# EAGLE board X04A-005-B (EAGLE 6.3)
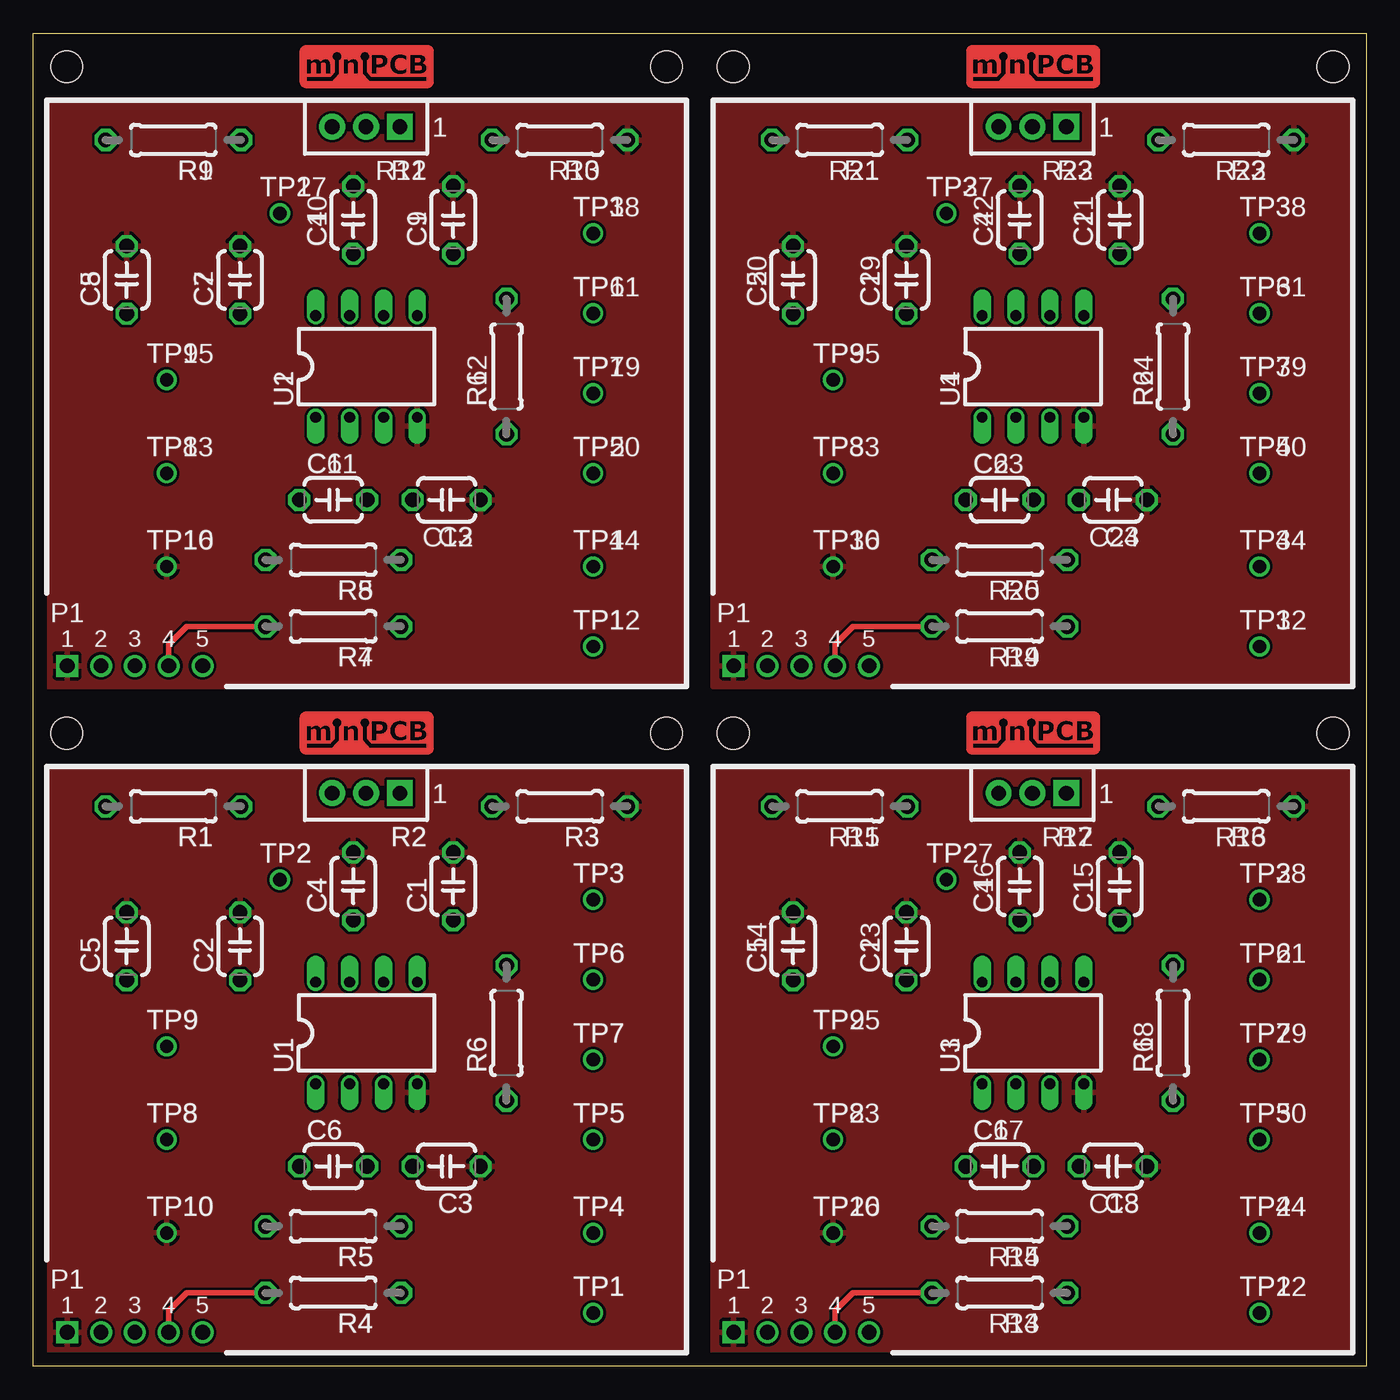
[diagram p0: board, top side]
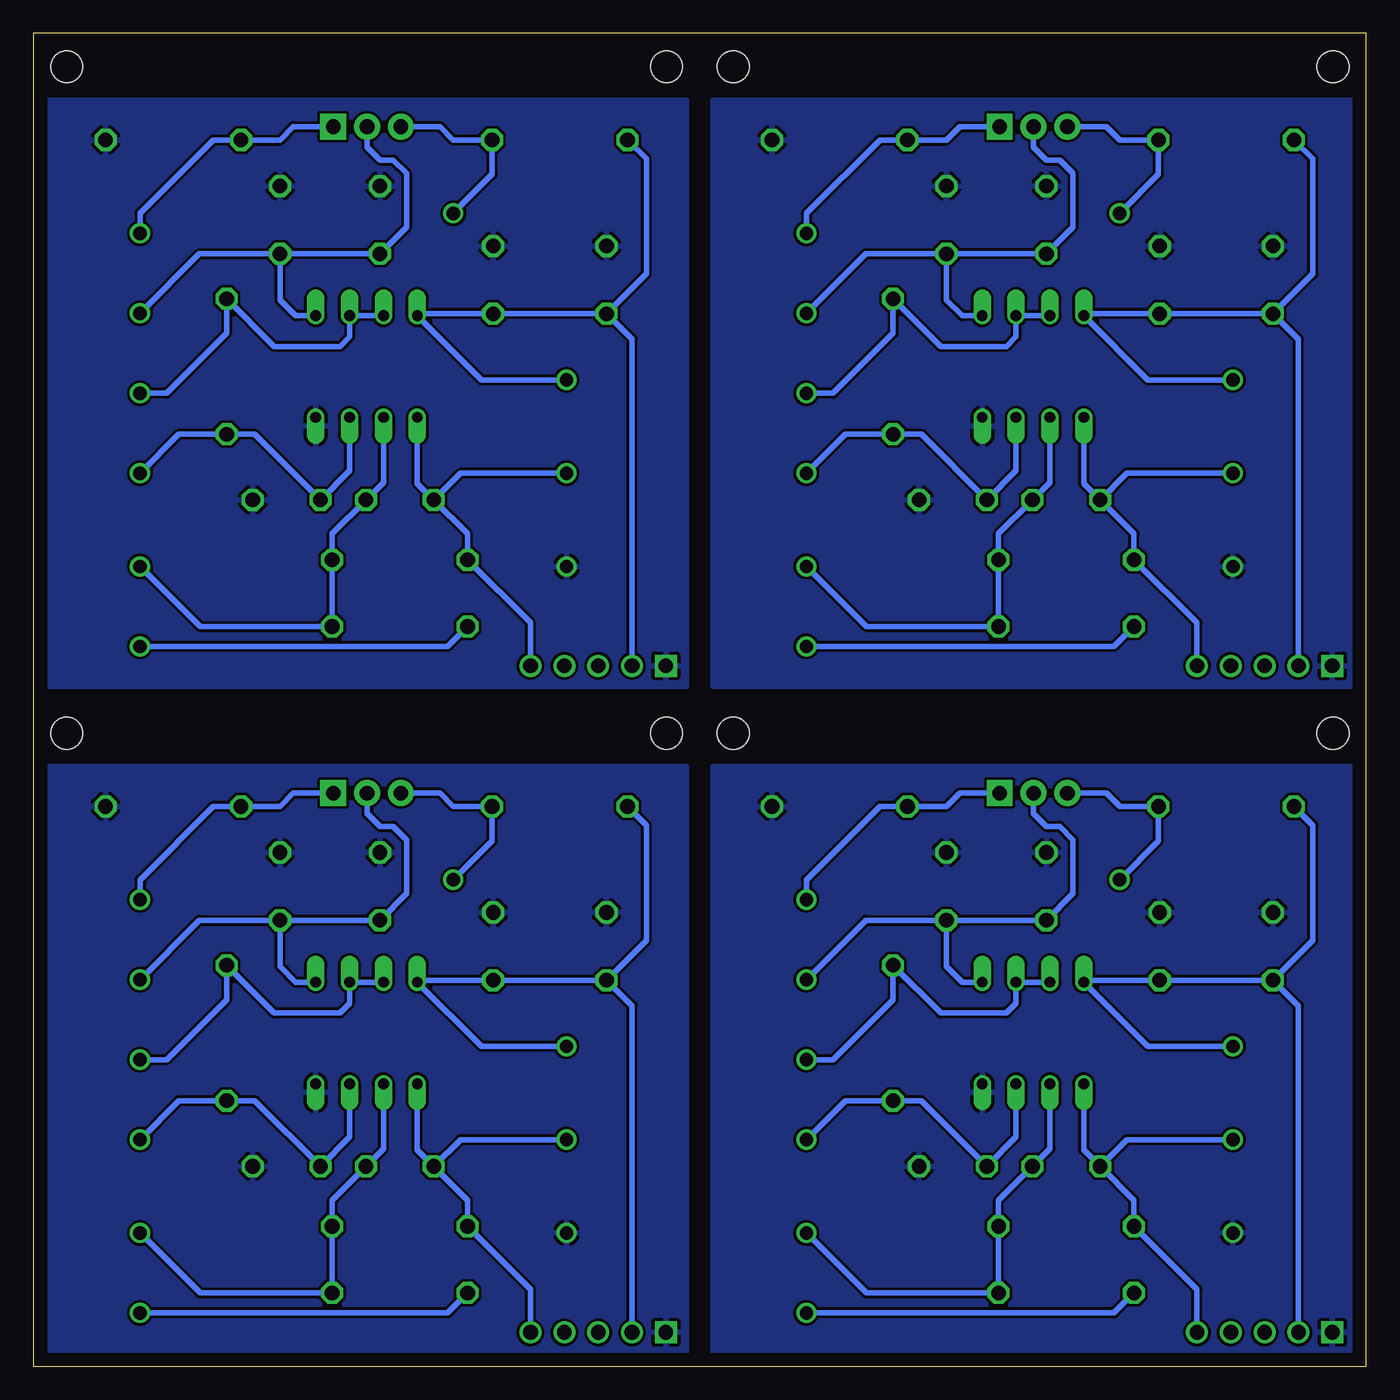
[diagram p1: board, bottom side, seen from below]

Size 100 x 100 mm. Coordinates in mm from the lower left corner, seen from the top.
Outline: 0,0 0,100 100,100 100,0 0,0
Copper layers (1*16): Top 0.035mm / dielectric 1.5mm / Bottom 0.035mm
Design rules "minipcb": minimum track width 10mil, minimum drill 24mil, track to track 8mil, track to pad 8mil, pad to pad 8mil, via to via 8mil, smd to smd 8mil, copper to edge 40mil, drill to drill 8mil, minimum pad ring 10mil, minimum via ring 8mil, stop-mask expansion 4mil, vias tented up to drill 20mil, thermal gap 10mil

## Footprints (pad centres in the part's own frame; a part is rotated, then mirrored left to right if it is on the bottom)
C050-024X044 = drill 1.1 octagon: 1 -2.54,0; 2 2.54,0
MINIPCB_5P_50X50MM = drill 1.1 square: 1 2.54,2.54 | drill 1.1: 2 5.08,2.54; 3 7.62,2.54; 4 10.16,2.54; 5 12.7,2.54 | hole 2.4: 47.5,47.5; 2.5,47.5
0207/10 = drill 1.1 octagon: 1 -5.08,0; 2 5.08,0
TRIM_0100 = drill 1.1 pad 1.93 square: 1 0,0 | drill 1.1 pad 1.93: 2 2.54,0; 3 5.08,0
PINS_1_TESTPOINT_KE5000_NOTEXT = drill 1: 1 0,0
DIL08 = drill 0.813 offset: 1 -3.81,-3.81; 2 -1.27,-3.81; 3 1.27,-3.81; 4 3.81,-3.81; 5 3.81,3.81; 6 1.27,3.81; 7 -1.27,3.81; 8 -3.81,3.81

## Placement (x,y rotation side)
C1  [C050-024X044]  31.5,36 90 top
C2  [C050-024X044]  15.5,31.5 90 top
C3  [C050-024X044]  31,15 180 top
C4  [C050-024X044]  24,36 90 top
C5  [C050-024X044]  7,31.5 90 top
C6  [C050-024X044]  22.5,15 0 top
C7  [C050-024X044]  15.5,81.5 90 top
C8  [C050-024X044]  7,81.5 90 top
C9  [C050-024X044]  31.5,86 90 top
C10  [C050-024X044]  24,86 90 top
C11  [C050-024X044]  22.5,65 0 top
C12  [C050-024X044]  31,65 180 top
C13  [C050-024X044]  65.5,31.5 90 top
C14  [C050-024X044]  57,31.5 90 top
C15  [C050-024X044]  81.5,36 90 top
C16  [C050-024X044]  74,36 90 top
C17  [C050-024X044]  72.5,15 0 top
C18  [C050-024X044]  81,15 180 top
C19  [C050-024X044]  65.5,81.5 90 top
C20  [C050-024X044]  57,81.5 90 top
C21  [C050-024X044]  81.5,86 90 top
C22  [C050-024X044]  74,86 90 top
C23  [C050-024X044]  72.5,65 0 top
C24  [C050-024X044]  81,65 180 top
E$1  [MINIPCB_PANEL_IMAGEFRAME]  -26.67,-31.75 0 top  (outside the outline)
P1-  [MINIPCB_5P_50X50MM]  0,0 0 top
P1-1  [MINIPCB_5P_50X50MM]  0,50 0 top
P1-2  [MINIPCB_5P_50X50MM]  50,0 0 top
P1-3  [MINIPCB_5P_50X50MM]  50,50 0 top
R1  [0207/10]  10.5,42 180 top
R2  [TRIM_0100]  27.5,43 180 top
R3  [0207/10]  39.5,42 180 top
R4  [0207/10]  22.5,5.5 180 top
R5  [0207/10]  22.5,10.5 180 top
R6  [0207/10]  35.5,25 90 top
R7  [0207/10]  22.5,55.5 180 top
R8  [0207/10]  22.5,60.5 180 top
R9  [0207/10]  10.5,92 180 top
R10  [0207/10]  39.5,92 180 top
R11  [TRIM_0100]  27.5,93 180 top
R12  [0207/10]  35.5,75 90 top
R13  [0207/10]  72.5,5.5 180 top
R14  [0207/10]  72.5,10.5 180 top
R15  [0207/10]  60.5,42 180 top
R16  [0207/10]  89.5,42 180 top
R17  [TRIM_0100]  77.5,43 180 top
R18  [0207/10]  85.5,25 90 top
R19  [0207/10]  72.5,55.5 180 top
R20  [0207/10]  72.5,60.5 180 top
R21  [0207/10]  60.5,92 180 top
R22  [0207/10]  89.5,92 180 top
R23  [TRIM_0100]  77.5,93 180 top
R24  [0207/10]  85.5,75 90 top
TP1  [PINS_1_TESTPOINT_KE5000_NOTEXT]  42,4 0 top
TP2  [PINS_1_TESTPOINT_KE5000_NOTEXT]  18.5,36.5 0 top
TP3  [PINS_1_TESTPOINT_KE5000_NOTEXT]  42,35 0 top
TP4  [PINS_1_TESTPOINT_KE5000_NOTEXT]  42,10 0 top
TP5  [PINS_1_TESTPOINT_KE5000_NOTEXT]  42,17 0 top
TP6  [PINS_1_TESTPOINT_KE5000_NOTEXT]  42,29 0 top
TP7  [PINS_1_TESTPOINT_KE5000_NOTEXT]  42,23 0 top
TP8  [PINS_1_TESTPOINT_KE5000_NOTEXT]  10,17 0 top
TP9  [PINS_1_TESTPOINT_KE5000_NOTEXT]  10,24 0 top
TP10  [PINS_1_TESTPOINT_KE5000_NOTEXT]  10,10 0 top
TP11  [PINS_1_TESTPOINT_KE5000_NOTEXT]  42,79 0 top
TP12  [PINS_1_TESTPOINT_KE5000_NOTEXT]  42,54 0 top
TP13  [PINS_1_TESTPOINT_KE5000_NOTEXT]  10,67 0 top
TP14  [PINS_1_TESTPOINT_KE5000_NOTEXT]  42,60 0 top
TP15  [PINS_1_TESTPOINT_KE5000_NOTEXT]  10,74 0 top
TP16  [PINS_1_TESTPOINT_KE5000_NOTEXT]  10,60 0 top
TP17  [PINS_1_TESTPOINT_KE5000_NOTEXT]  18.5,86.5 0 top
TP18  [PINS_1_TESTPOINT_KE5000_NOTEXT]  42,85 0 top
TP19  [PINS_1_TESTPOINT_KE5000_NOTEXT]  42,73 0 top
TP20  [PINS_1_TESTPOINT_KE5000_NOTEXT]  42,67 0 top
TP21  [PINS_1_TESTPOINT_KE5000_NOTEXT]  92,29 0 top
TP22  [PINS_1_TESTPOINT_KE5000_NOTEXT]  92,4 0 top
TP23  [PINS_1_TESTPOINT_KE5000_NOTEXT]  60,17 0 top
TP24  [PINS_1_TESTPOINT_KE5000_NOTEXT]  92,10 0 top
TP25  [PINS_1_TESTPOINT_KE5000_NOTEXT]  60,24 0 top
TP26  [PINS_1_TESTPOINT_KE5000_NOTEXT]  60,10 0 top
TP27  [PINS_1_TESTPOINT_KE5000_NOTEXT]  68.5,36.5 0 top
TP28  [PINS_1_TESTPOINT_KE5000_NOTEXT]  92,35 0 top
TP29  [PINS_1_TESTPOINT_KE5000_NOTEXT]  92,23 0 top
TP30  [PINS_1_TESTPOINT_KE5000_NOTEXT]  92,17 0 top
TP31  [PINS_1_TESTPOINT_KE5000_NOTEXT]  92,79 0 top
TP32  [PINS_1_TESTPOINT_KE5000_NOTEXT]  92,54 0 top
TP33  [PINS_1_TESTPOINT_KE5000_NOTEXT]  60,67 0 top
TP34  [PINS_1_TESTPOINT_KE5000_NOTEXT]  92,60 0 top
TP35  [PINS_1_TESTPOINT_KE5000_NOTEXT]  60,74 0 top
TP36  [PINS_1_TESTPOINT_KE5000_NOTEXT]  60,60 0 top
TP37  [PINS_1_TESTPOINT_KE5000_NOTEXT]  68.5,86.5 0 top
TP38  [PINS_1_TESTPOINT_KE5000_NOTEXT]  92,85 0 top
TP39  [PINS_1_TESTPOINT_KE5000_NOTEXT]  92,73 0 top
TP40  [PINS_1_TESTPOINT_KE5000_NOTEXT]  92,67 0 top
U1  [DIL08]  25,25 0 top
U2  [DIL08]  25,75 0 top
U3  [DIL08]  75,25 0 top
U4  [DIL08]  75,75 0 top

## Library data of the parts
C1-C24 E$1 R1-R24 TP1-TP40 U1-U4 = minipcb
P1- P1-1-P1-3 = minipcb; PART_NUMBER: X04A-005-B; REVISION: B

## Nets
GND: C1.2 C2.2 C3.1 C4.2 C5.2 P1-.1 R3.1 TP10.1 U1.4
GND1: C7.2 C8.2 C9.2 C10.2 C12.1 P1-1.1 R10.1 TP16.1 U2.4
GND2: C13.2 C14.2 C15.2 C16.2 C18.1 P1-2.1 R16.1 TP26.1 U3.4
GND3: C19.2 C20.2 C21.2 C22.2 C24.1 P1-3.1 R22.1 TP36.1 U4.4
IN: P1-.4 R4.2 TP1.1
IN1: P1-1.4 R7.2 TP12.1
IN2: P1-2.4 R13.2 TP22.1
IN3: P1-3.4 R19.2 TP32.1
N$1: C1.1 C4.1 R2.2 TP6.1 U1.5
N$2: C3.2 R6.1 TP5.1 U1.3
N$3: C9.1 C10.1 R11.2 TP11.1 U2.5
N$4: C12.2 R12.1 TP20.1 U2.3
N$5: C15.1 C16.1 R17.2 TP21.1 U3.5
N$6: C18.2 R18.1 TP30.1 U3.3
N$7: C21.1 C22.1 R23.2 TP31.1 U4.5
N$8: C24.2 R24.1 TP40.1 U4.3
NC: P1-.3
NC1: P1-1.3
NC2: P1-2.3
NC3: P1-3.3
OUT: C6.1 P1-.5 R5.2 TP8.1 U1.1
OUT1: C11.1 P1-1.5 R8.2 TP13.1 U2.1
OUT2: C17.1 P1-2.5 R14.2 TP23.1 U3.1
OUT3: C23.1 P1-3.5 R20.2 TP33.1 U4.1
P1.1: R2.1 R3.2 TP3.1
P1.2: R9.1 R11.3 TP17.1
P1.3: R1.1 R2.3 TP2.1
P1.4: R10.2 R11.1 TP18.1
P1.5: R15.1 R17.3 TP27.1
P1.6: R16.2 R17.1 TP28.1
P1.7: R21.1 R23.3 TP37.1
P1.8: R22.2 R23.1 TP38.1
V+: C2.1 C5.1 P1-.2 R1.2 TP9.1 U1.8
V+1: C7.1 C8.1 P1-1.2 R9.2 TP15.1 U2.8
V+2: C13.1 C14.1 P1-2.2 R15.2 TP25.1 U3.8
V+3: C19.1 C20.1 P1-3.2 R21.2 TP35.1 U4.8
VFB: C6.2 R4.1 R5.1 TP4.1 U1.2
VFB1: C11.2 R7.1 R8.1 TP14.1 U2.2
VFB2: C17.2 R13.1 R14.1 TP24.1 U3.2
VFB3: C23.2 R19.1 R20.1 TP34.1 U4.2
VREF: R6.2 TP7.1 U1.6 U1.7
VREF1: R12.2 TP19.1 U2.6 U2.7
VREF2: R18.2 TP29.1 U3.6 U3.7
VREF3: R24.2 TP39.1 U4.6 U4.7

## Tracks (layer width: path | path; a pad name or v marks a point on that pad's centre or on a via)
GND
  pour Top: 1,1 49,1 49,45 1,45
  pour Bottom: 1,1 49,1 49,45 1,45
GND1
  pour Top: 1,51 49,51 49,95 1,95
  pour Bottom: 1,51 49,51 49,95 1,95
GND2
  pour Top: 51,1 99,1 99,45 51,45
  pour Bottom: 51,1 99,1 99,45 51,45
GND3
  pour Top: 51,51 99,51 99,95 51,95
  pour Bottom: 51,51 99,51 99,95 51,95
IN
  Top 0.406: P1-.4 10.16,4.16 11.5,5.5 R4.2
  Bottom 0.406: R4.2 18.92,4 TP1.1
IN1
  Top 0.406: P1-1.4 10.16,54.16 11.5,55.5 R7.2
  Bottom 0.406: R7.2 18.92,54 TP12.1
IN2
  Top 0.406: P1-2.4 60.16,4.16 61.5,5.5 R13.2
  Bottom 0.406: R13.2 68.92,4 TP22.1
IN3
  Top 0.406: P1-3.4 60.16,54.16 61.5,55.5 R19.2
  Bottom 0.406: R19.2 68.92,54 TP32.1
N$1
  Bottom 0.406: U1.5 30.31,28.81 31.5,30 C1.1 | R2.2 24.96,41.46 24,40.5 23,40.5 22,39.5 22,35.46 C4.1 C1.1 | TP6.1 37.54,33.46 C1.1
N$2
  Bottom 0.406: U1.3 26.27,17.19 C3.2 33.38,19.92 R6.1 39.08,19.92 TP5.1
N$3
  Bottom 0.406: U2.5 30.31,78.81 31.5,80 C9.1 | R11.2 24.96,91.46 24,90.5 23,90.5 22,89.5 22,85.46 C10.1 C9.1 | TP11.1 37.54,83.46 C9.1
N$4
  Bottom 0.406: U2.3 26.27,67.19 C12.2 33.38,69.92 R12.1 39.08,69.92 TP20.1
N$5
  Bottom 0.406: U3.5 80.31,28.81 81.5,30 C15.1 | R17.2 74.96,41.46 74,40.5 73,40.5 72,39.5 72,35.46 C16.1 C15.1 | TP21.1 87.54,33.46 C15.1
N$6
  Bottom 0.406: U3.3 76.27,17.19 C18.2 83.38,19.92 R18.1 89.08,19.92 TP30.1
N$7
  Bottom 0.406: U4.5 80.31,78.81 81.5,80 C21.1 | R23.2 74.96,91.46 74,90.5 73,90.5 72,89.5 72,85.46 C22.1 C21.1 | TP31.1 87.54,83.46 C21.1
N$8
  Bottom 0.406: U4.3 76.27,67.19 C24.2 83.38,69.92 R24.1 89.08,69.92 TP40.1
OUT
  Bottom 0.406: P1-.5 12.7,5.78 R5.2 17.42,12.46 C6.1 | C6.1 21.19,16.23 U1.1 | TP8.1 17.96,17 C6.1
OUT1
  Bottom 0.406: P1-1.5 12.7,55.78 R8.2 17.42,62.46 C11.1 | C11.1 21.19,66.23 U2.1 | TP13.1 17.96,67 C11.1
OUT2
  Bottom 0.406: P1-2.5 62.7,5.78 R14.2 67.42,12.46 C17.1 | C17.1 71.19,16.23 U3.1 | TP23.1 67.96,17 C17.1
OUT3
  Bottom 0.406: P1-3.5 62.7,55.78 R20.2 67.42,62.46 C23.1 | C23.1 71.19,66.23 U4.1 | TP33.1 67.96,67 C23.1
P1.1
  Bottom 0.406: R2.1 30.5,43 31.5,42 R3.2 36.5,42 42,36.5 TP3.1
P1.2
  Bottom 0.406: R11.3 19.5,93 18.5,92 R9.1 15.58,89.42 TP17.1
P1.3
  Bottom 0.406: R2.3 19.5,43 18.5,42 R1.1 15.58,39.42 TP2.1
P1.4
  Bottom 0.406: R11.1 30.5,93 31.5,92 R10.2 36.5,92 42,86.5 TP18.1
P1.5
  Bottom 0.406: R17.3 69.5,43 68.5,42 R15.1 65.58,39.42 TP27.1
P1.6
  Bottom 0.406: R17.1 80.5,43 81.5,42 R16.2 86.5,42 92,36.5 TP28.1
P1.7
  Bottom 0.406: R23.3 69.5,93 68.5,92 R21.1 65.58,89.42 TP37.1
P1.8
  Bottom 0.406: R23.1 80.5,93 81.5,92 R22.2 86.5,92 92,86.5 TP38.1
V+
  Bottom 0.406: C5.1 C2.1 21.19,28.96 U1.8 16.38,24 TP9.1 | P1-.2 5.08,27.04 C5.1 | C5.1 4,31.96 4,40.58 R1.2
V+1
  Bottom 0.406: C8.1 C7.1 21.19,78.96 U2.8 16.38,74 TP15.1 | P1-1.2 5.08,77.04 C8.1 | C8.1 4,81.96 4,90.58 R9.2
V+2
  Bottom 0.406: C14.1 C13.1 71.19,28.96 U3.8 66.38,24 TP25.1 | P1-2.2 55.08,27.04 C14.1 | C14.1 54,31.96 54,40.58 R15.2
V+3
  Bottom 0.406: C20.1 C19.1 71.19,78.96 U4.8 66.38,74 TP35.1 | P1-3.2 55.08,77.04 C20.1 | C20.1 54,81.96 54,90.58 R21.2
VFB
  Bottom 0.406: U1.2 23.73,16.31 C6.2 27.58,12.46 R5.1 R4.1 37.5,5.5 TP4.1
VFB1
  Bottom 0.406: U2.2 23.73,66.31 C11.2 27.58,62.46 R8.1 R7.1 37.5,55.5 TP14.1
VFB2
  Bottom 0.406: U3.2 73.73,16.31 C17.2 77.58,12.46 R14.1 R13.1 87.5,5.5 TP24.1
VFB3
  Bottom 0.406: U4.2 73.73,66.31 C23.2 77.58,62.46 R20.1 R19.1 87.5,55.5 TP34.1
VREF
  Bottom 0.406: U1.7 U1.6 26.27,27.23 27,26.5 31.92,26.5 R6.2 35.5,27.5 40,23 TP7.1
VREF1
  Bottom 0.406: U2.7 U2.6 26.27,77.23 27,76.5 31.92,76.5 R12.2 35.5,77.5 40,73 TP19.1
VREF2
  Bottom 0.406: U3.7 U3.6 76.27,27.23 77,26.5 81.92,26.5 R18.2 85.5,27.5 90,23 TP29.1
VREF3
  Bottom 0.406: U4.7 U4.6 76.27,77.23 77,76.5 81.92,76.5 R24.2 85.5,77.5 90,73 TP39.1

## Text on the board
_tNames: R1 | R2 | R3 | R1 | R2 | R3 | TP2 | TP2 | TP3 | TP3 | C4 | C1 | C4 | C1 | TP6 | TP6 | C5 | C2 | C5 | C2 | TP9 | TP9 | TP7 | TP7 | U1 | R6 | U1 | R6 | TP8 | TP5 | TP8 | TP5 | C6 | C6 | C3 | C3 | TP10 | TP4 | TP10 | TP4 | R5 | R5 | TP1 | TP1 | R4 | R4 | R1 | R2 | R3 | R1 | R2 | R3 | TP2 | TP2 | TP3 | TP3 | C4 | C1 | C4 | C1 | TP6 | TP6 | C5 | C2 | C5 | C2 | TP9 | TP9 | TP7 | TP7 | U1 | R6 | U1 | R6 | TP8 | TP5 | TP8 | TP5 | C6 | C6 | C3 | C3 | TP10 | TP4 | TP10 | TP4 | R5 | R5 | TP1 | TP1 | R4 | R4